# EAGLE board ExpositionTest (EAGLE 6.1)
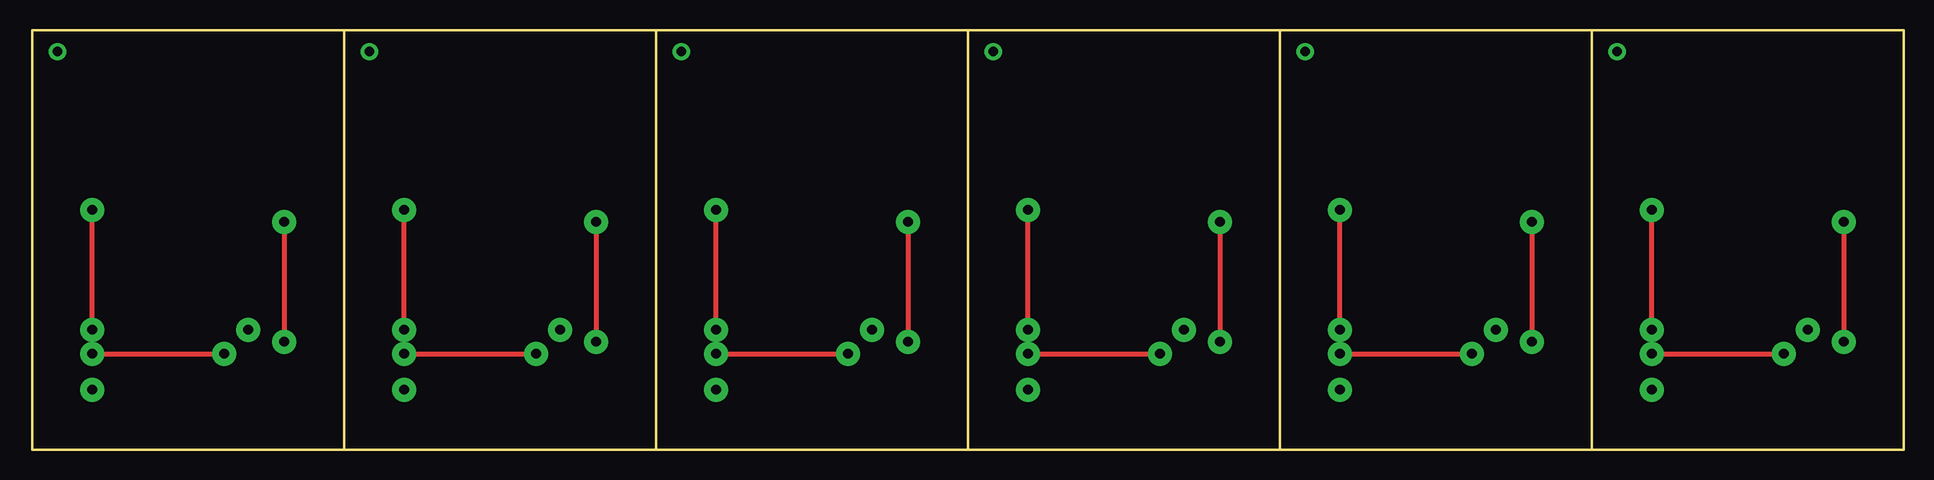
[diagram p0: board, top side]
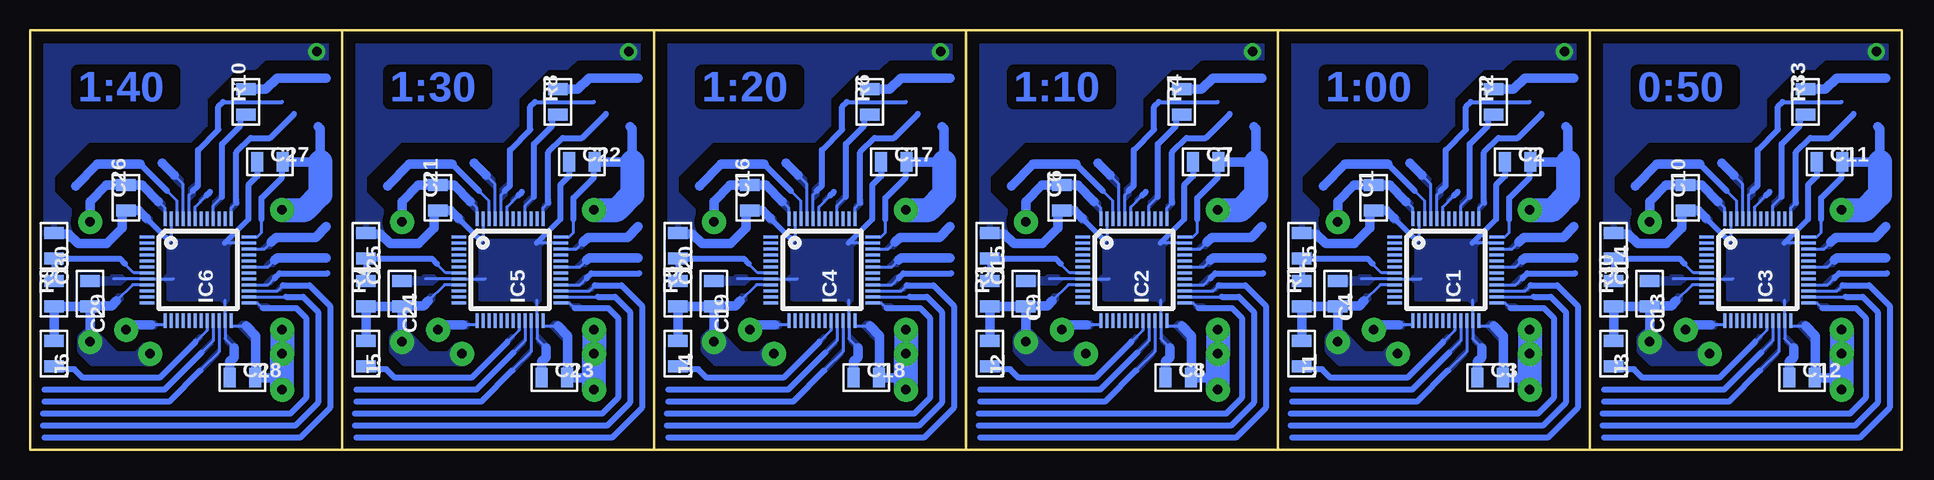
[diagram p1: board, bottom side, seen from below]

Size 156 x 35 mm. Coordinates in mm from the lower left corner, seen from the top.
Outline: 26,0 0,0 0,35 26,35
Outline: 26,0 26,35
Outline: 26,0 52,0
Outline: 52,0 52,35
Outline: 52,35 26,35
Outline: 26,35 26,0
Outline: 52,0 78,0
Outline: 78,0 78,35
Outline: 78,35 52,35
Outline: 52,35 52,0
Outline: 78,0 104,0
Outline: 104,0 104,35
Outline: 104,35 78,35
Outline: 78,35 78,0
Outline: 104,0 130,0
Outline: 130,0 130,35
Outline: 130,35 104,35
Outline: 104,35 104,0
Outline: 130,0 156,0 156,35 130,35
Outline: 130,35 130,0
Copper layers (1*16): Top 0.035mm / dielectric 1.5mm / Bottom 0.035mm
Design rules: minimum track width 0.25mm, minimum drill 0.6mm, track to track 0.25mm, track to pad 0.25mm, pad to pad 0.25mm, via to via 0.25mm, smd to smd 0mil, copper to edge 1mm, drill to drill 0.5mm, minimum pad ring 10mil, minimum via ring 8mil, stop-mask expansion 4mil, vias tented up to drill 0mil, thermal gap 10mil

## Footprints (pad centres in the part's own frame; a part is rotated, then mirrored left to right if it is on the bottom)
RSMD_0805 = smd 1 x 1.6: PAD_0 -1.05,0; PAD_1 1.05,0
LQFP48 = smd 0.25 x 1.2: 1 -2.75,-4.25; 2 -2.25,-4.25; 3 -1.75,-4.25; 4 -1.25,-4.25; 5 -0.75,-4.25; 6 -0.25,-4.25; 7 0.25,-4.25; 8 0.75,-4.25; 9 1.25,-4.25; 10 1.75,-4.25; 11 2.25,-4.25; 12 2.75,-4.25; 25 2.75,4.25; 26 2.25,4.25; 27 1.75,4.25; 28 1.25,4.25; 29 0.75,4.25; 30 0.25,4.25; 31 -0.25,4.25; 32 -0.75,4.25; 33 -1.25,4.25; 34 -1.75,4.25; 35 -2.25,4.25; 36 -2.75,4.25 | smd 1.2 x 0.25: 13 4.25,-2.75; 14 4.25,-2.25; 15 4.25,-1.75; 16 4.25,-1.25; 17 4.25,-0.75; 18 4.25,-0.25; 19 4.25,0.25; 20 4.25,0.75; 21 4.25,1.25; 22 4.25,1.75; 23 4.25,2.25; 24 4.25,2.75; 37 -4.25,2.75; 38 -4.25,2.25; 39 -4.25,1.75; 40 -4.25,1.25; 41 -4.25,0.75; 42 -4.25,0.25; 43 -4.25,-0.25; 44 -4.25,-0.75; 45 -4.25,-1.25; 46 -4.25,-1.75; 47 -4.25,-2.25; 48 -4.25,-2.75

## Placement (x,y rotation side)
C1  0.1uF  [RSMD_0805]  44,21 90 bottom
C2  0.1uF  [RSMD_0805]  32,24 0 bottom
C3  0.1uF  [RSMD_0805]  34.3,6 0 bottom
C4  0.1uF  [RSMD_0805]  47,13 270 bottom
C5  0.1uF  [RSMD_0805]  50,17 270 bottom
C6  0.1uF  [RSMD_0805]  70,21 90 bottom
C7  0.1uF  [RSMD_0805]  58,24 0 bottom
C8  0.1uF  [RSMD_0805]  60.3,6 0 bottom
C9  0.1uF  [RSMD_0805]  73,13 270 bottom
C10  0.1uF  [RSMD_0805]  18,21 90 bottom
C11  0.1uF  [RSMD_0805]  6,24 0 bottom
C12  0.1uF  [RSMD_0805]  8.3,6 0 bottom
C13  0.1uF  [RSMD_0805]  21,13 270 bottom
C14  0.1uF  [RSMD_0805]  24,17 270 bottom
C15  0.1uF  [RSMD_0805]  76,17 270 bottom
C16  0.1uF  [RSMD_0805]  96,21 90 bottom
C17  0.1uF  [RSMD_0805]  84,24 0 bottom
C18  0.1uF  [RSMD_0805]  86.3,6 0 bottom
C19  0.1uF  [RSMD_0805]  99,13 270 bottom
C20  0.1uF  [RSMD_0805]  102,17 270 bottom
C21  0.1uF  [RSMD_0805]  122,21 90 bottom
C22  0.1uF  [RSMD_0805]  110,24 0 bottom
C23  0.1uF  [RSMD_0805]  112.3,6 0 bottom
C24  0.1uF  [RSMD_0805]  125,13 270 bottom
C25  0.1uF  [RSMD_0805]  128,17 270 bottom
C26  0.1uF  [RSMD_0805]  148,21 90 bottom
C27  0.1uF  [RSMD_0805]  136,24 0 bottom
C28  0.1uF  [RSMD_0805]  138.3,6 0 bottom
C29  0.1uF  [RSMD_0805]  151,13 270 bottom
C30  0.1uF  [RSMD_0805]  154,17 270 bottom
IC1  STM32F103C8T6  [LQFP48]  38,15 270 bottom
IC2  STM32F103C8T6  [LQFP48]  64,15 270 bottom
IC3  STM32F103C8T6  [LQFP48]  12,15 270 bottom
IC4  STM32F103C8T6  [LQFP48]  90,15 270 bottom
IC5  STM32F103C8T6  [LQFP48]  116,15 270 bottom
IC6  STM32F103C8T6  [LQFP48]  142,15 270 bottom
J1  0  [RSMD_0805]  50,8 270 bottom
J2  0  [RSMD_0805]  76,8 270 bottom
J3  0  [RSMD_0805]  24,8 270 bottom
J4  0  [RSMD_0805]  102,8 270 bottom
J5  0  [RSMD_0805]  128,8 270 bottom
J6  0  [RSMD_0805]  154,8 270 bottom
R1  10K  [RSMD_0805]  50,13 90 bottom
R2  1K0  [RSMD_0805]  34,29 90 bottom
R3  10K  [RSMD_0805]  76,13 90 bottom
R4  1K0  [RSMD_0805]  60,29 90 bottom
R5  10K  [RSMD_0805]  102,13 90 bottom
R6  1K0  [RSMD_0805]  86,29 90 bottom
R7  10K  [RSMD_0805]  128,13 90 bottom
R8  1K0  [RSMD_0805]  112,29 90 bottom
R9  10K  [RSMD_0805]  154,13 90 bottom
R10  1K0  [RSMD_0805]  138,29 90 bottom
R30  10K  [RSMD_0805]  24,13 90 bottom
R33  1K0  [RSMD_0805]  8,29 90 bottom

## Library data of the parts
C1-C30 IC1-IC6 J1-J6 R1-R10 R30 R33 = __MyCommonLib1

## Nets
+3.3V: C10.PAD_1 C11.PAD_1 C12.PAD_1 C13.PAD_1 IC3.9 IC3.24 IC3.36 IC3.48 J3.PAD_0 R30.PAD_0
+3.3V1: C1.PAD_1 C2.PAD_1 C3.PAD_1 C4.PAD_1 IC1.9 IC1.24 IC1.36 IC1.48 J1.PAD_0 R1.PAD_0
+3.3V2: C6.PAD_1 C7.PAD_1 C8.PAD_1 C9.PAD_1 IC2.9 IC2.24 IC2.36 IC2.48 J2.PAD_0 R3.PAD_0
+3.3V3: C16.PAD_1 C17.PAD_1 C18.PAD_1 C19.PAD_1 IC4.9 IC4.24 IC4.36 IC4.48 J4.PAD_0 R5.PAD_0
+3.3V4: C21.PAD_1 C22.PAD_1 C23.PAD_1 C24.PAD_1 IC5.9 IC5.24 IC5.36 IC5.48 J5.PAD_0 R7.PAD_0
+3.3V5: C26.PAD_1 C27.PAD_1 C28.PAD_1 C29.PAD_1 IC6.9 IC6.24 IC6.36 IC6.48 J6.PAD_0 R9.PAD_0
ADC_9V: IC3.13
ADC_9V1: IC1.13
ADC_9V2: IC2.13
ADC_9V3: IC4.13
ADC_9V4: IC5.13
ADC_9V5: IC6.13
BOOT0: IC3.44
BOOT1: IC3.20 J3.PAD_1
BOOT2: IC1.20 J1.PAD_1
BOOT3: IC1.44
BOOT4: IC2.20 J2.PAD_1
BOOT5: IC2.44
BOOT6: IC4.20 J4.PAD_1
BOOT7: IC4.44
BOOT8: IC5.20 J5.PAD_1
BOOT9: IC5.44
BOOT10: IC6.20 J6.PAD_1
BOOT11: IC6.44
ERROR_LED: IC3.40 R33.PAD_0
ERROR_LED1: IC1.40 R2.PAD_0
ERROR_LED2: IC2.40 R4.PAD_0
ERROR_LED3: IC4.40 R6.PAD_0
ERROR_LED4: IC5.40 R8.PAD_0
ERROR_LED5: IC6.40 R10.PAD_0
GND: C10.PAD_0 C11.PAD_0 C12.PAD_0 C13.PAD_0 C14.PAD_0 IC3.8 IC3.23 IC3.35 IC3.47
GND1: C1.PAD_0 C2.PAD_0 C3.PAD_0 C4.PAD_0 C5.PAD_0 IC1.8 IC1.23 IC1.35 IC1.47
GND7: C6.PAD_0 C7.PAD_0 C8.PAD_0 C9.PAD_0 C15.PAD_0 IC2.8 IC2.23 IC2.35 IC2.47
GND8: C16.PAD_0 C17.PAD_0 C18.PAD_0 C19.PAD_0 C20.PAD_0 IC4.8 IC4.23 IC4.35 IC4.47
GND9: C21.PAD_0 C22.PAD_0 C23.PAD_0 C24.PAD_0 C25.PAD_0 IC5.8 IC5.23 IC5.35 IC5.47
GND10: C26.PAD_0 C27.PAD_0 C28.PAD_0 C29.PAD_0 C30.PAD_0 IC6.8 IC6.23 IC6.35 IC6.47
I2C_SCL: IC3.21
I2C_SCL1: IC1.21
I2C_SCL2: IC2.21
I2C_SCL3: IC4.21
I2C_SCL4: IC5.21
I2C_SCL5: IC6.21
I2C_SDA: IC3.22
I2C_SDA1: IC1.22
I2C_SDA2: IC2.22
I2C_SDA3: IC4.22
I2C_SDA4: IC5.22
I2C_SDA5: IC6.22
LCD_D1: IC1.27
LCD_D2: IC1.26
LCD_D3: IC1.28
LCD_D4: IC3.25
LCD_D5: IC3.28
LCD_D6: IC3.26
LCD_D7: IC3.27
LCD_D8: IC1.25
LCD_D9: IC2.27
LCD_D10: IC2.26
LCD_D11: IC2.28
LCD_D12: IC2.25
LCD_D13: IC4.27
LCD_D14: IC4.26
LCD_D15: IC4.28
LCD_D16: IC4.25
LCD_D17: IC5.27
LCD_D18: IC5.26
LCD_D19: IC5.28
LCD_D20: IC5.25
LCD_D21: IC6.27
LCD_D22: IC6.26
LCD_D23: IC6.28
LCD_D24: IC6.25
LCD_E: IC3.43
LCD_E1: IC1.43
LCD_E2: IC2.43
LCD_E3: IC4.43
LCD_E4: IC5.43
LCD_E5: IC6.43
LCD_R/~W: IC3.46
LCD_R/~W1: IC1.46
LCD_R/~W2: IC2.46
LCD_R/~W3: IC4.46
LCD_R/~W4: IC5.46
LCD_R/~W5: IC6.46
LCD_RS: IC3.45
LCD_RS1: IC1.45
LCD_RS2: IC2.45
LCD_RS3: IC4.45
LCD_RS4: IC5.45
LCD_RS5: IC6.45
N$1: R2.PAD_1
N$2: R4.PAD_1
N$3: R6.PAD_1
N$4: R8.PAD_1
N$5: R10.PAD_1
N$19: R33.PAD_1
NRST: C14.PAD_1 IC3.7 R30.PAD_1
NRST1: C5.PAD_1 IC1.7 R1.PAD_1
NRST2: C15.PAD_1 IC2.7 R3.PAD_1
NRST3: C20.PAD_1 IC4.7 R5.PAD_1
NRST4: C25.PAD_1 IC5.7 R7.PAD_1
NRST5: C30.PAD_1 IC6.7 R9.PAD_1
PWR_HOLD: IC3.31
PWR_HOLD1: IC1.31
PWR_HOLD2: IC2.31
PWR_HOLD3: IC4.31
PWR_HOLD4: IC5.31
PWR_HOLD5: IC6.31
SWDCLK: IC3.37
SWDCLK1: IC1.37
SWDCLK2: IC2.37
SWDCLK3: IC4.37
SWDCLK4: IC5.37
SWDCLK5: IC6.37
SWDIO: IC3.34
SWDIO1: IC1.34
SWDIO2: IC2.34
SWDIO3: IC4.34
SWDIO4: IC5.34
SWDIO5: IC6.34

## Tracks (layer width: path | path; a pad name or v marks a point on that pad's centre or on a via)
+3.3V  (via drill 0.8 pad 2)
  Top 0.4: v5,8 v16,8 | v5,10 v5,20
  Top 0.406: v21,19 v21,9
  Bottom 0.25: IC3.24 9.25,10.3 8,10.3 | IC3.9 17.45,13.75 18.8,12.4 | IC3.48 14.75,20.15 15.3,20.7 | IC3.36 7.05,17.75 6.7,18.1 6.7,19.2
  Bottom 0.406: 20.95,12 C13.PAD_1
  Bottom 0.5: 6.7,19.2 6.7,21 5,22.7 5,23.95 C11.PAD_1
  Bottom 0.8: 8,10.3 7.2,9.5 7.2,6.05 C12.PAD_1 5.5,6 5,5.5 | 18.8,12.4 19.2,12 20.95,12 | v21,9 C13.PAD_1 R30.PAD_0 J3.PAD_0 | v21,19 21,20.7 19.65,22.05 C10.PAD_1 16.65,22.05 15.3,20.7 | C11.PAD_1 4.85,24.1 4.75,24 1.81,24 1.81,26.76 2,26.95
  Bottom 2: v5,10 v5,8 5,5.5 v5,5 | 1.81,24 1.81,21.27 3.08,20 v5,20
  pour Bottom: 15.3,8.2 15.3,7.7 15.8,7.2 20.8,7.2 21.8,8.2 21.8,9.4 21.4,9.8 20.6,9.8 18.8,8 17.1,8 16.4,8.7 15.8,8.7
  pour Bottom (no thermals): 14.8,19.8 14.8,20.6 15.2,21 15.6,20.6
  pour Bottom: 7.4,10.1 7.9,10.6 8.4,10.6 8.7,10.3 7.4,9
  pour Bottom: 18.7,12.1 18.3,12.5 18.3,12.9 18.7,12.9 19.1,12.5
+3.3V1  (via drill 0.8 pad 2)
  Top 0.4: v31,8 v42,8 | v31,10 v31,20
  Top 0.406: v47,19 v47,9
  Bottom 0.25: IC1.24 35.25,10.3 34,10.3 | IC1.9 43.45,13.75 44.8,12.4 | IC1.48 40.75,20.15 41.3,20.7 | IC1.36 33.05,17.75 32.7,18.1 32.7,19.2
  Bottom 0.406: 46.95,12 C4.PAD_1
  Bottom 0.5: 32.7,19.2 32.7,21 31,22.7 31,23.95 C2.PAD_1
  Bottom 0.8: 34,10.3 33.2,9.5 33.2,6.05 C3.PAD_1 31.5,6 31,5.5 | 44.8,12.4 45.2,12 46.95,12 | v47,9 C4.PAD_1 R1.PAD_0 J1.PAD_0 | v47,19 47,20.7 45.65,22.05 C1.PAD_1 42.65,22.05 41.3,20.7 | C2.PAD_1 30.85,24.1 30.75,24 27.81,24 27.81,26.76 28,26.95
  Bottom 2: v31,10 v31,8 31,5.5 v31,5 | 27.81,24 27.81,21.27 29.08,20 v31,20
  pour Bottom: 41.3,8.2 41.3,7.7 41.8,7.2 46.8,7.2 47.8,8.2 47.8,9.4 47.4,9.8 46.6,9.8 44.8,8 43.1,8 42.4,8.7 41.8,8.7
  pour Bottom (no thermals): 40.8,19.8 40.8,20.6 41.2,21 41.6,20.6
  pour Bottom: 33.4,10.1 33.9,10.6 34.4,10.6 34.7,10.3 33.4,9
  pour Bottom: 44.7,12.1 44.3,12.5 44.3,12.9 44.7,12.9 45.1,12.5
+3.3V2  (via drill 0.8 pad 2)
  Top 0.4: v57,8 v68,8 | v57,10 v57,20
  Top 0.406: v73,19 v73,9
  Bottom 0.25: IC2.24 61.25,10.3 60,10.3 | IC2.9 69.45,13.75 70.8,12.4 | IC2.48 66.75,20.15 67.3,20.7 | IC2.36 59.05,17.75 58.7,18.1 58.7,19.2
  Bottom 0.406: 72.95,12 C9.PAD_1
  Bottom 0.5: 58.7,19.2 58.7,21 57,22.7 57,23.95 C7.PAD_1
  Bottom 0.8: 60,10.3 59.2,9.5 59.2,6.05 C8.PAD_1 57.5,6 57,5.5 | 70.8,12.4 71.2,12 72.95,12 | v73,9 C9.PAD_1 R3.PAD_0 J2.PAD_0 | v73,19 73,20.7 71.65,22.05 C6.PAD_1 68.65,22.05 67.3,20.7 | C7.PAD_1 56.85,24.1 56.75,24 53.81,24 53.81,26.76 54,26.95
  Bottom 2: v57,10 v57,8 57,5.5 v57,5 | 53.81,24 53.81,21.27 55.08,20 v57,20
  pour Bottom: 67.3,8.2 67.3,7.7 67.8,7.2 72.8,7.2 73.8,8.2 73.8,9.4 73.4,9.8 72.6,9.8 70.8,8 69.1,8 68.4,8.7 67.8,8.7
  pour Bottom (no thermals): 66.8,19.8 66.8,20.6 67.2,21 67.6,20.6
  pour Bottom: 59.4,10.1 59.9,10.6 60.4,10.6 60.7,10.3 59.4,9
  pour Bottom: 70.7,12.1 70.3,12.5 70.3,12.9 70.7,12.9 71.1,12.5
+3.3V3  (via drill 0.8 pad 2)
  Top 0.4: v83,8 v94,8 | v83,10 v83,20
  Top 0.406: v99,19 v99,9
  Bottom 0.25: IC4.24 87.25,10.3 86,10.3 | IC4.9 95.45,13.75 96.8,12.4 | IC4.48 92.75,20.15 93.3,20.7 | IC4.36 85.05,17.75 84.7,18.1 84.7,19.2
  Bottom 0.406: 98.95,12 C19.PAD_1
  Bottom 0.5: 84.7,19.2 84.7,21 83,22.7 83,23.95 C17.PAD_1
  Bottom 0.8: 86,10.3 85.2,9.5 85.2,6.05 C18.PAD_1 83.5,6 83,5.5 | 96.8,12.4 97.2,12 98.95,12 | v99,9 C19.PAD_1 R5.PAD_0 J4.PAD_0 | v99,19 99,20.7 97.65,22.05 C16.PAD_1 94.65,22.05 93.3,20.7 | C17.PAD_1 82.85,24.1 82.75,24 79.81,24 79.81,26.76 80,26.95
  Bottom 2: v83,10 v83,8 83,5.5 v83,5 | 79.81,24 79.81,21.27 81.08,20 v83,20
  pour Bottom: 93.3,8.2 93.3,7.7 93.8,7.2 98.8,7.2 99.8,8.2 99.8,9.4 99.4,9.8 98.6,9.8 96.8,8 95.1,8 94.4,8.7 93.8,8.7
  pour Bottom (no thermals): 92.8,19.8 92.8,20.6 93.2,21 93.6,20.6
  pour Bottom: 85.4,10.1 85.9,10.6 86.4,10.6 86.7,10.3 85.4,9
  pour Bottom: 96.7,12.1 96.3,12.5 96.3,12.9 96.7,12.9 97.1,12.5
+3.3V4  (via drill 0.8 pad 2)
  Top 0.4: v109,8 v120,8 | v109,10 v109,20
  Top 0.406: v125,19 v125,9
  Bottom 0.25: IC5.24 113.25,10.3 112,10.3 | IC5.9 121.45,13.75 122.8,12.4 | IC5.48 118.75,20.15 119.3,20.7 | IC5.36 111.05,17.75 110.7,18.1 110.7,19.2
  Bottom 0.406: 124.95,12 C24.PAD_1
  Bottom 0.5: 110.7,19.2 110.7,21 109,22.7 109,23.95 C22.PAD_1
  Bottom 0.8: 112,10.3 111.2,9.5 111.2,6.05 C23.PAD_1 109.5,6 109,5.5 | 122.8,12.4 123.2,12 124.95,12 | v125,9 C24.PAD_1 R7.PAD_0 J5.PAD_0 | v125,19 125,20.7 123.65,22.05 C21.PAD_1 120.65,22.05 119.3,20.7 | C22.PAD_1 108.85,24.1 108.75,24 105.81,24 105.81,26.76 106,26.95
  Bottom 2: v109,10 v109,8 109,5.5 v109,5 | 105.81,24 105.81,21.27 107.08,20 v109,20
  pour Bottom: 119.3,8.2 119.3,7.7 119.8,7.2 124.8,7.2 125.8,8.2 125.8,9.4 125.4,9.8 124.6,9.8 122.8,8 121.1,8 120.4,8.7 119.8,8.7
  pour Bottom (no thermals): 118.8,19.8 118.8,20.6 119.2,21 119.6,20.6
  pour Bottom: 111.4,10.1 111.9,10.6 112.4,10.6 112.7,10.3 111.4,9
  pour Bottom: 122.7,12.1 122.3,12.5 122.3,12.9 122.7,12.9 123.1,12.5
+3.3V5  (via drill 0.8 pad 2)
  Top 0.4: v135,8 v146,8 | v135,10 v135,20
  Top 0.406: v151,19 v151,9
  Bottom 0.25: IC6.24 139.25,10.3 138,10.3 | IC6.9 147.45,13.75 148.8,12.4 | IC6.48 144.75,20.15 145.3,20.7 | IC6.36 137.05,17.75 136.7,18.1 136.7,19.2
  Bottom 0.406: 150.95,12 C29.PAD_1
  Bottom 0.5: 136.7,19.2 136.7,21 135,22.7 135,23.95 C27.PAD_1
  Bottom 0.8: 138,10.3 137.2,9.5 137.2,6.05 C28.PAD_1 135.5,6 135,5.5 | 148.8,12.4 149.2,12 150.95,12 | v151,9 C29.PAD_1 R9.PAD_0 J6.PAD_0 | v151,19 151,20.7 149.65,22.05 C26.PAD_1 146.65,22.05 145.3,20.7 | C27.PAD_1 134.85,24.1 134.75,24 131.81,24 131.81,26.76 132,26.95
  Bottom 2: v135,10 v135,8 135,5.5 v135,5 | 131.81,24 131.81,21.27 133.08,20 v135,20
  pour Bottom: 145.3,8.2 145.3,7.7 145.8,7.2 150.8,7.2 151.8,8.2 151.8,9.4 151.4,9.8 150.6,9.8 148.8,8 147.1,8 146.4,8.7 145.8,8.7
  pour Bottom (no thermals): 144.8,19.8 144.8,20.6 145.2,21 145.6,20.6
  pour Bottom: 137.4,10.1 137.9,10.6 138.4,10.6 138.7,10.3 137.4,9
  pour Bottom: 148.7,12.1 148.3,12.5 148.3,12.9 148.7,12.9 149.1,12.5
ADC_9V  (via drill 0.8 pad 2)
  Bottom 0.25: IC3.13 14.75,10.4 15.9,10.4
  Bottom 0.8: 15.9,10.4 17.6,10.4 v18,10
  pour Bottom: 15.3,10.4 15.6,10.1 16,10.1 16,10.7 15.6,10.7
ADC_9V1  (via drill 0.8 pad 2)
  Bottom 0.25: IC1.13 40.75,10.4 41.9,10.4
  Bottom 0.8: 41.9,10.4 43.6,10.4 v44,10
  pour Bottom: 41.3,10.4 41.6,10.1 42,10.1 42,10.7 41.6,10.7
ADC_9V2  (via drill 0.8 pad 2)
  Bottom 0.25: IC2.13 66.75,10.4 67.9,10.4
  Bottom 0.8: 67.9,10.4 69.6,10.4 v70,10
  pour Bottom: 67.3,10.4 67.6,10.1 68,10.1 68,10.7 67.6,10.7
ADC_9V3  (via drill 0.8 pad 2)
  Bottom 0.25: IC4.13 92.75,10.4 93.9,10.4
  Bottom 0.8: 93.9,10.4 95.6,10.4 v96,10
  pour Bottom: 93.3,10.4 93.6,10.1 94,10.1 94,10.7 93.6,10.7
ADC_9V4  (via drill 0.8 pad 2)
  Bottom 0.25: IC5.13 118.75,10.4 119.9,10.4
  Bottom 0.8: 119.9,10.4 121.6,10.4 v122,10
  pour Bottom: 119.3,10.4 119.6,10.1 120,10.1 120,10.7 119.6,10.7
ADC_9V5  (via drill 0.8 pad 2)
  Bottom 0.25: IC6.13 144.75,10.4 145.9,10.4
  Bottom 0.8: 145.9,10.4 147.6,10.4 v148,10
  pour Bottom: 145.3,10.4 145.6,10.1 146,10.1 146,10.7 145.6,10.7
BOOT0
  Bottom 0.25: IC3.44 12.75,21.25 12.4,21.6
  Bottom 0.35: 9.9,29 5,29
  Bottom 0.5: 9.9,29 10.3,28.6 10.3,26.7 12,25 12,22 12.4,21.6
  pour Bottom: 12,22.5 12,21.8 12.3,21.5 12.3,21.2 12.7,20.8 12.7,21.8
BOOT1
  Bottom 0.25: IC3.20 11.25,9.95 12.2,9
  Bottom 0.4: 23.95,7 J3.PAD_1
  Bottom 0.5: 12.2,9 15.2,6 21.6,6 22.3,6.7 23.75,6.7 J3.PAD_1
  pour Bottom: 12.1,8.9 11.7,9.3 11.7,9.5 11.9,9.5 12.3,9.1
BOOT2
  Bottom 0.25: IC1.20 37.25,9.95 38.2,9
  Bottom 0.4: 49.95,7 J1.PAD_1
  Bottom 0.5: 38.2,9 41.2,6 47.6,6 48.3,6.7 49.75,6.7 J1.PAD_1
  pour Bottom: 38.1,8.9 37.7,9.3 37.7,9.5 37.9,9.5 38.3,9.1
BOOT3
  Bottom 0.25: IC1.44 38.75,21.25 38.4,21.6
  Bottom 0.35: 35.9,29 31,29
  Bottom 0.5: 35.9,29 36.3,28.6 36.3,26.7 38,25 38,22 38.4,21.6
  pour Bottom: 38,22.5 38,21.8 38.3,21.5 38.3,21.2 38.7,20.8 38.7,21.8
BOOT4
  Bottom 0.25: IC2.20 63.25,9.95 64.2,9
  Bottom 0.4: 75.95,7 J2.PAD_1
  Bottom 0.5: 64.2,9 67.2,6 73.6,6 74.3,6.7 75.75,6.7 J2.PAD_1
  pour Bottom: 64.1,8.9 63.7,9.3 63.7,9.5 63.9,9.5 64.3,9.1
BOOT5
  Bottom 0.25: IC2.44 64.75,21.25 64.4,21.6
  Bottom 0.35: 61.9,29 57,29
  Bottom 0.5: 61.9,29 62.3,28.6 62.3,26.7 64,25 64,22 64.4,21.6
  pour Bottom: 64,22.5 64,21.8 64.3,21.5 64.3,21.2 64.7,20.8 64.7,21.8
BOOT6
  Bottom 0.25: IC4.20 89.25,9.95 90.2,9
  Bottom 0.4: 101.95,7 J4.PAD_1
  Bottom 0.5: 90.2,9 93.2,6 99.6,6 100.3,6.7 101.75,6.7 J4.PAD_1
  pour Bottom: 90.1,8.9 89.7,9.3 89.7,9.5 89.9,9.5 90.3,9.1
BOOT7
  Bottom 0.25: IC4.44 90.75,21.25 90.4,21.6
  Bottom 0.35: 87.9,29 83,29
  Bottom 0.5: 87.9,29 88.3,28.6 88.3,26.7 90,25 90,22 90.4,21.6
  pour Bottom: 90,22.5 90,21.8 90.3,21.5 90.3,21.2 90.7,20.8 90.7,21.8
BOOT8
  Bottom 0.25: IC5.20 115.25,9.95 116.2,9
  Bottom 0.4: 127.95,7 J5.PAD_1
  Bottom 0.5: 116.2,9 119.2,6 125.6,6 126.3,6.7 127.75,6.7 J5.PAD_1
  pour Bottom: 116.1,8.9 115.7,9.3 115.7,9.5 115.9,9.5 116.3,9.1
BOOT9
  Bottom 0.25: IC5.44 116.75,21.25 116.4,21.6
  Bottom 0.35: 113.9,29 109,29
  Bottom 0.5: 113.9,29 114.3,28.6 114.3,26.7 116,25 116,22 116.4,21.6
  pour Bottom: 116,22.5 116,21.8 116.3,21.5 116.3,21.2 116.7,20.8 116.7,21.8
BOOT10
  Bottom 0.25: IC6.20 141.25,9.95 142.2,9
  Bottom 0.4: 153.95,7 J6.PAD_1
  Bottom 0.5: 142.2,9 145.2,6 151.6,6 152.3,6.7 153.75,6.7 J6.PAD_1
  pour Bottom: 142.1,8.9 141.7,9.3 141.7,9.5 141.9,9.5 142.3,9.1
BOOT11
  Bottom 0.25: IC6.44 142.75,21.25 142.4,21.6
  Bottom 0.35: 139.9,29 135,29
  Bottom 0.5: 139.9,29 140.3,28.6 140.3,26.7 142,25 142,22 142.4,21.6
  pour Bottom: 142,22.5 142,21.8 142.3,21.5 142.3,21.2 142.7,20.8 142.7,21.8
ERROR_LED
  Bottom 0.25: IC3.40 10.75,20.35 10,21.1
  Bottom 0.5: 10,21.1 10,25.5 8.5,27 8.5,27.45 arc90 R33.PAD_0
  pour Bottom: 9.9,21.5 9.9,21 10.7,20.2 10.7,20.7
ERROR_LED1
  Bottom 0.25: IC1.40 36.75,20.35 36,21.1
  Bottom 0.5: 36,21.1 36,25.5 34.5,27 34.5,27.45 arc90 R2.PAD_0
  pour Bottom: 35.9,21.5 35.9,21 36.7,20.2 36.7,20.7
ERROR_LED2
  Bottom 0.25: IC2.40 62.75,20.35 62,21.1
  Bottom 0.5: 62,21.1 62,25.5 60.5,27 60.5,27.45 arc90 R4.PAD_0
  pour Bottom: 61.9,21.5 61.9,21 62.7,20.2 62.7,20.7
ERROR_LED3
  Bottom 0.25: IC4.40 88.75,20.35 88,21.1
  Bottom 0.5: 88,21.1 88,25.5 86.5,27 86.5,27.45 arc90 R6.PAD_0
  pour Bottom: 87.9,21.5 87.9,21 88.7,20.2 88.7,20.7
ERROR_LED4
  Bottom 0.25: IC5.40 114.75,20.35 114,21.1
  Bottom 0.5: 114,21.1 114,25.5 112.5,27 112.5,27.45 arc90 R8.PAD_0
  pour Bottom: 113.9,21.5 113.9,21 114.7,20.2 114.7,20.7
ERROR_LED5
  Bottom 0.25: IC6.40 140.75,20.35 140,21.1
  Bottom 0.5: 140,21.1 140,25.5 138.5,27 138.5,27.45 arc90 R10.PAD_0
  pour Bottom: 139.9,21.5 139.9,21 140.7,20.2 140.7,20.7
GND  (via drill 0.8 pad 1.42)
  Bottom 0.25: IC3.35 9.65,17.25 | 9.75,12.45 IC3.23 9.75,9.25 9,8.5 | IC3.47 14.25,17.55 | 14.05,14.25 IC3.8 19.05,14.25
  Bottom 0.4: 16.3,19.3 14.4,17.4 | 7.8,19.2 9.8,17.2
  Bottom 0.5: 7.8,19.2 7.8,22.05 7.05,22.8 C11.PAD_0
  Bottom 0.8: C12.PAD_0 9.35,7.35 9,7.7 9,8.5 | C14.PAD_0 23.95,18 22.8,18 22,17.2 19.6,17.2 18.3,18.5 18.3,19.65 C10.PAD_0 16.95,19.95 16.3,19.3
  other vias: 2.1,33.2
  pour Bottom: 9.5,17.5 9.2,17.8 9.2,17.2 9.5,16.9 9.5,12.4 9.7,12.2 9.8,12.2 10.1,12.5 14.5,12.5 14.5,13.9 14.8,14.2 14.8,14.3 14.5,14.6 14.5,17.4 14.7,17.6 14.7,17.8 14.2,17.8 13.9,17.5
  pour Bottom (isolate 0.6): 1.2,32.7 6.5,32.7 7.3,31.9 8.9,31.9 11.5,29.3 11.5,26.9 12.6,25.8 21.2,25.8 24.2,22.8 24.2,21.4 22.7,19.9 22.7,18 22.8,17.9 24.7,17.9 24.8,33.8 1.2,33.8
  pour Bottom: 8.7,8.5 8.7,8.6 9.7,9.6 9.7,9 9.2,8.5
  pour Bottom (no thermals): 21.1,13.8 18.4,13.8 18,14.2 18.3,14.5 19.2,14.5 19.4,14.3 21.1,14.3
  pour Bottom: 15.9,18.9 16.3,18.9 16.6,19.2 16.2,19.6 15.9,19.3
GND1  (via drill 0.8 pad 1.42)
  Bottom 0.25: IC1.35 35.65,17.25 | 35.75,12.45 IC1.23 35.75,9.25 35,8.5 | IC1.47 40.25,17.55 | 40.05,14.25 IC1.8 45.05,14.25
  Bottom 0.4: 42.3,19.3 40.4,17.4 | 33.8,19.2 35.8,17.2
  Bottom 0.5: 33.8,19.2 33.8,22.05 33.05,22.8 C2.PAD_0
  Bottom 0.8: C3.PAD_0 35.35,7.35 35,7.7 35,8.5 | C5.PAD_0 49.95,18 48.8,18 48,17.2 45.6,17.2 44.3,18.5 44.3,19.65 C1.PAD_0 42.95,19.95 42.3,19.3
  other vias: 28.1,33.2
  pour Bottom: 35.5,17.5 35.2,17.8 35.2,17.2 35.5,16.9 35.5,12.4 35.7,12.2 35.8,12.2 36.1,12.5 40.5,12.5 40.5,13.9 40.8,14.2 40.8,14.3 40.5,14.6 40.5,17.4 40.7,17.6 40.7,17.8 40.2,17.8 39.9,17.5
  pour Bottom (isolate 0.6): 27.2,32.7 32.5,32.7 33.3,31.9 34.9,31.9 37.5,29.3 37.5,26.9 38.6,25.8 47.2,25.8 50.2,22.8 50.2,21.4 48.7,19.9 48.7,18 48.8,17.9 50.7,17.9 50.8,33.8 27.2,33.8
  pour Bottom: 34.7,8.5 34.7,8.6 35.7,9.6 35.7,9 35.2,8.5
  pour Bottom (no thermals): 47.1,13.8 44.4,13.8 44,14.2 44.3,14.5 45.2,14.5 45.4,14.3 47.1,14.3
  pour Bottom: 41.9,18.9 42.3,18.9 42.6,19.2 42.2,19.6 41.9,19.3
GND7  (via drill 0.8 pad 1.42)
  Bottom 0.25: IC2.35 61.65,17.25 | 61.75,12.45 IC2.23 61.75,9.25 61,8.5 | IC2.47 66.25,17.55 | 66.05,14.25 IC2.8 71.05,14.25
  Bottom 0.4: 68.3,19.3 66.4,17.4 | 59.8,19.2 61.8,17.2
  Bottom 0.5: 59.8,19.2 59.8,22.05 59.05,22.8 C7.PAD_0
  Bottom 0.8: C8.PAD_0 61.35,7.35 61,7.7 61,8.5 | C15.PAD_0 75.95,18 74.8,18 74,17.2 71.6,17.2 70.3,18.5 70.3,19.65 C6.PAD_0 68.95,19.95 68.3,19.3
  other vias: 54.1,33.2
  pour Bottom: 61.5,17.5 61.2,17.8 61.2,17.2 61.5,16.9 61.5,12.4 61.7,12.2 61.8,12.2 62.1,12.5 66.5,12.5 66.5,13.9 66.8,14.2 66.8,14.3 66.5,14.6 66.5,17.4 66.7,17.6 66.7,17.8 66.2,17.8 65.9,17.5
  pour Bottom (isolate 0.6): 53.2,32.7 58.5,32.7 59.3,31.9 60.9,31.9 63.5,29.3 63.5,26.9 64.6,25.8 73.2,25.8 76.2,22.8 76.2,21.4 74.7,19.9 74.7,18 74.8,17.9 76.7,17.9 76.8,33.8 53.2,33.8
  pour Bottom: 60.7,8.5 60.7,8.6 61.7,9.6 61.7,9 61.2,8.5
  pour Bottom (no thermals): 73.1,13.8 70.4,13.8 70,14.2 70.3,14.5 71.2,14.5 71.4,14.3 73.1,14.3
  pour Bottom: 67.9,18.9 68.3,18.9 68.6,19.2 68.2,19.6 67.9,19.3
GND8  (via drill 0.8 pad 1.42)
  Bottom 0.25: IC4.35 87.65,17.25 | 87.75,12.45 IC4.23 87.75,9.25 87,8.5 | IC4.47 92.25,17.55 | 92.05,14.25 IC4.8 97.05,14.25
  Bottom 0.4: 94.3,19.3 92.4,17.4 | 85.8,19.2 87.8,17.2
  Bottom 0.5: 85.8,19.2 85.8,22.05 85.05,22.8 C17.PAD_0
  Bottom 0.8: C18.PAD_0 87.35,7.35 87,7.7 87,8.5 | C20.PAD_0 101.95,18 100.8,18 100,17.2 97.6,17.2 96.3,18.5 96.3,19.65 C16.PAD_0 94.95,19.95 94.3,19.3
  other vias: 80.1,33.2
  pour Bottom: 87.5,17.5 87.2,17.8 87.2,17.2 87.5,16.9 87.5,12.4 87.7,12.2 87.8,12.2 88.1,12.5 92.5,12.5 92.5,13.9 92.8,14.2 92.8,14.3 92.5,14.6 92.5,17.4 92.7,17.6 92.7,17.8 92.2,17.8 91.9,17.5
  pour Bottom (isolate 0.6): 79.2,32.7 84.5,32.7 85.3,31.9 86.9,31.9 89.5,29.3 89.5,26.9 90.6,25.8 99.2,25.8 102.2,22.8 102.2,21.4 100.7,19.9 100.7,18 100.8,17.9 102.7,17.9 102.8,33.8 79.2,33.8
  pour Bottom: 86.7,8.5 86.7,8.6 87.7,9.6 87.7,9 87.2,8.5
  pour Bottom (no thermals): 99.1,13.8 96.4,13.8 96,14.2 96.3,14.5 97.2,14.5 97.4,14.3 99.1,14.3
  pour Bottom: 93.9,18.9 94.3,18.9 94.6,19.2 94.2,19.6 93.9,19.3
GND9  (via drill 0.8 pad 1.42)
  Bottom 0.25: IC5.35 113.65,17.25 | 113.75,12.45 IC5.23 113.75,9.25 113,8.5 | IC5.47 118.25,17.55 | 118.05,14.25 IC5.8 123.05,14.25
  Bottom 0.4: 120.3,19.3 118.4,17.4 | 111.8,19.2 113.8,17.2
  Bottom 0.5: 111.8,19.2 111.8,22.05 111.05,22.8 C22.PAD_0
  Bottom 0.8: C23.PAD_0 113.35,7.35 113,7.7 113,8.5 | C25.PAD_0 127.95,18 126.8,18 126,17.2 123.6,17.2 122.3,18.5 122.3,19.65 C21.PAD_0 120.95,19.95 120.3,19.3
  other vias: 106.1,33.2
  pour Bottom: 113.5,17.5 113.2,17.8 113.2,17.2 113.5,16.9 113.5,12.4 113.7,12.2 113.8,12.2 114.1,12.5 118.5,12.5 118.5,13.9 118.8,14.2 118.8,14.3 118.5,14.6 118.5,17.4 118.7,17.6 118.7,17.8 118.2,17.8 117.9,17.5
  pour Bottom (isolate 0.6): 105.2,32.7 110.5,32.7 111.3,31.9 112.9,31.9 115.5,29.3 115.5,26.9 116.6,25.8 125.2,25.8 128.2,22.8 128.2,21.4 126.7,19.9 126.7,18 126.8,17.9 128.7,17.9 128.8,33.8 105.2,33.8
  pour Bottom: 112.7,8.5 112.7,8.6 113.7,9.6 113.7,9 113.2,8.5
  pour Bottom (no thermals): 125.1,13.8 122.4,13.8 122,14.2 122.3,14.5 123.2,14.5 123.4,14.3 125.1,14.3
  pour Bottom: 119.9,18.9 120.3,18.9 120.6,19.2 120.2,19.6 119.9,19.3
GND10  (via drill 0.8 pad 1.42)
  Bottom 0.25: IC6.35 139.65,17.25 | 139.75,12.45 IC6.23 139.75,9.25 139,8.5 | IC6.47 144.25,17.55 | 144.05,14.25 IC6.8 149.05,14.25
  Bottom 0.4: 146.3,19.3 144.4,17.4 | 137.8,19.2 139.8,17.2
  Bottom 0.5: 137.8,19.2 137.8,22.05 137.05,22.8 C27.PAD_0
  Bottom 0.8: C28.PAD_0 139.35,7.35 139,7.7 139,8.5 | C30.PAD_0 153.95,18 152.8,18 152,17.2 149.6,17.2 148.3,18.5 148.3,19.65 C26.PAD_0 146.95,19.95 146.3,19.3
  other vias: 132.1,33.2
  pour Bottom: 139.5,17.5 139.2,17.8 139.2,17.2 139.5,16.9 139.5,12.4 139.7,12.2 139.8,12.2 140.1,12.5 144.5,12.5 144.5,13.9 144.8,14.2 144.8,14.3 144.5,14.6 144.5,17.4 144.7,17.6 144.7,17.8 144.2,17.8 143.9,17.5
  pour Bottom (isolate 0.6): 131.2,32.7 136.5,32.7 137.3,31.9 138.9,31.9 141.5,29.3 141.5,26.9 142.6,25.8 151.2,25.8 154.2,22.8 154.2,21.4 152.7,19.9 152.7,18 152.8,17.9 154.7,17.9 154.8,33.8 131.2,33.8
  pour Bottom: 138.7,8.5 138.7,8.6 139.7,9.6 139.7,9 139.2,8.5
  pour Bottom (no thermals): 151.1,13.8 148.4,13.8 148,14.2 148.3,14.5 149.2,14.5 149.4,14.3 151.1,14.3
  pour Bottom: 145.9,18.9 146.3,18.9 146.6,19.2 146.2,19.6 145.9,19.3
I2C_SCL
  Bottom 0.25: IC3.21 10.75,9.05 11.7,8.1
  Bottom 0.5: 11.7,8.1 14.8,5 24.8,5
  pour Bottom: 11.7,7.9 10.8,8.8 10.8,9.2 11.9,8.1
I2C_SCL1
  Bottom 0.25: IC1.21 36.75,9.05 37.7,8.1
  Bottom 0.5: 37.7,8.1 40.8,5 50.8,5
  pour Bottom: 37.7,7.9 36.8,8.8 36.8,9.2 37.9,8.1
I2C_SCL2
  Bottom 0.25: IC2.21 62.75,9.05 63.7,8.1
  Bottom 0.5: 63.7,8.1 66.8,5 76.8,5
  pour Bottom: 63.7,7.9 62.8,8.8 62.8,9.2 63.9,8.1
I2C_SCL3
  Bottom 0.25: IC4.21 88.75,9.05 89.7,8.1
  Bottom 0.5: 89.7,8.1 92.8,5 102.8,5
  pour Bottom: 89.7,7.9 88.8,8.8 88.8,9.2 89.9,8.1
I2C_SCL4
  Bottom 0.25: IC5.21 114.75,9.05 115.7,8.1
  Bottom 0.5: 115.7,8.1 118.8,5 128.8,5
  pour Bottom: 115.7,7.9 114.8,8.8 114.8,9.2 115.9,8.1
I2C_SCL5
  Bottom 0.25: IC6.21 140.75,9.05 141.7,8.1
  Bottom 0.5: 141.7,8.1 144.8,5 154.8,5
  pour Bottom: 141.7,7.9 140.8,8.8 140.8,9.2 141.9,8.1
I2C_SDA
  Bottom 0.25: IC3.22 10.25,8.15 11.8,6.6
  Bottom 0.5: 11.8,6.6 14.4,4 24.8,4
  pour Bottom: 11.7,6.5 10.3,7.9 10.3,8.3 11.9,6.7
I2C_SDA1
  Bottom 0.25: IC1.22 36.25,8.15 37.8,6.6
  Bottom 0.5: 37.8,6.6 40.4,4 50.8,4
  pour Bottom: 37.7,6.5 36.3,7.9 36.3,8.3 37.9,6.7
I2C_SDA2
  Bottom 0.25: IC2.22 62.25,8.15 63.8,6.6
  Bottom 0.5: 63.8,6.6 66.4,4 76.8,4
  pour Bottom: 63.7,6.5 62.3,7.9 62.3,8.3 63.9,6.7
I2C_SDA3
  Bottom 0.25: IC4.22 88.25,8.15 89.8,6.6
  Bottom 0.5: 89.8,6.6 92.4,4 102.8,4
  pour Bottom: 89.7,6.5 88.3,7.9 88.3,8.3 89.9,6.7
I2C_SDA4
  Bottom 0.25: IC5.22 114.25,8.15 115.8,6.6
  Bottom 0.5: 115.8,6.6 118.4,4 128.8,4
  pour Bottom: 115.7,6.5 114.3,7.9 114.3,8.3 115.9,6.7
I2C_SDA5
  Bottom 0.25: IC6.22 140.25,8.15 141.8,6.6
  Bottom 0.5: 141.8,6.6 144.4,4 154.8,4
  pour Bottom: 141.7,6.5 140.3,7.9 140.3,8.3 141.9,6.7
LCD_D1
  Bottom 0.25: IC1.27 31.35,13.25 30.9,13.7
  Bottom 0.5: 30.9,13.7 28.7,13.7 27,12 27,3.5 29.5,1 50.8,1
  pour Bottom: 30.6,13.8 31,13.8 31.5,13.3 31.1,13.3
LCD_D2
  Bottom 0.25: IC1.26 30.65,12.75
  Bottom 0.5: 30.65,12.75 29.25,12.75 28,11.5 28,3.9 29.9,2 50.9,2
LCD_D3
  Bottom 0.25: IC1.28 32.15,13.75 31.6,14.3
  Bottom 0.5: 31.6,14.3 31.2,14.7 27.2,14.7
  pour Bottom: 31.2,14.5 31.9,13.8 32.5,13.8 31.8,14.5
LCD_D4
  Bottom 0.25: IC3.25 7.05,12.25 6.6,11.8
  Bottom 0.5: 6.6,11.8 3.8,11.8 3,11 3,4.3 4.3,3 24.9,3
  pour Bottom (no thermals): 5.8,11.7 6.7,11.7 6.9,11.9 6.9,12.1 6.2,12.1
LCD_D5
  Bottom 0.25: IC3.28 6.15,13.75 5.6,14.3
  Bottom 0.5: 5.6,14.3 5.2,14.7 1.2,14.7
  pour Bottom: 5.2,14.5 5.9,13.8 6.5,13.8 5.8,14.5
LCD_D6
  Bottom 0.25: IC3.26 4.65,12.75
  Bottom 0.5: 4.65,12.75 3.25,12.75 2,11.5 2,3.9 3.9,2 24.9,2
LCD_D7
  Bottom 0.25: IC3.27 5.35,13.25 4.9,13.7
  Bottom 0.5: 4.9,13.7 2.7,13.7 1,12 1,3.5 3.5,1 24.8,1
  pour Bottom: 4.6,13.8 5,13.8 5.5,13.3 5.1,13.3
LCD_D8
  Bottom 0.25: IC1.25 33.05,12.25 32.6,11.8
  Bottom 0.5: 32.6,11.8 29.8,11.8 29,11 29,4.3 30.3,3 50.9,3
  pour Bottom (no thermals): 31.8,11.7 32.7,11.7 32.9,11.9 32.9,12.1 32.2,12.1
LCD_D9
  Bottom 0.25: IC2.27 57.35,13.25 56.9,13.7
  Bottom 0.5: 56.9,13.7 54.7,13.7 53,12 53,3.5 55.5,1 76.8,1
  pour Bottom: 56.6,13.8 57,13.8 57.5,13.3 57.1,13.3
LCD_D10
  Bottom 0.25: IC2.26 56.65,12.75
  Bottom 0.5: 56.65,12.75 55.25,12.75 54,11.5 54,3.9 55.9,2 76.9,2
LCD_D11
  Bottom 0.25: IC2.28 58.15,13.75 57.6,14.3
  Bottom 0.5: 57.6,14.3 57.2,14.7 53.2,14.7
  pour Bottom: 57.2,14.5 57.9,13.8 58.5,13.8 57.8,14.5
LCD_D12
  Bottom 0.25: IC2.25 59.05,12.25 58.6,11.8
  Bottom 0.5: 58.6,11.8 55.8,11.8 55,11 55,4.3 56.3,3 76.9,3
  pour Bottom (no thermals): 57.8,11.7 58.7,11.7 58.9,11.9 58.9,12.1 58.2,12.1
LCD_D13
  Bottom 0.25: IC4.27 83.35,13.25 82.9,13.7
  Bottom 0.5: 82.9,13.7 80.7,13.7 79,12 79,3.5 81.5,1 102.8,1
  pour Bottom: 82.6,13.8 83,13.8 83.5,13.3 83.1,13.3
LCD_D14
  Bottom 0.25: IC4.26 82.65,12.75
  Bottom 0.5: 82.65,12.75 81.25,12.75 80,11.5 80,3.9 81.9,2 102.9,2
LCD_D15
  Bottom 0.25: IC4.28 84.15,13.75 83.6,14.3
  Bottom 0.5: 83.6,14.3 83.2,14.7 79.2,14.7
  pour Bottom: 83.2,14.5 83.9,13.8 84.5,13.8 83.8,14.5
LCD_D16
  Bottom 0.25: IC4.25 85.05,12.25 84.6,11.8
  Bottom 0.5: 84.6,11.8 81.8,11.8 81,11 81,4.3 82.3,3 102.9,3
  pour Bottom (no thermals): 83.8,11.7 84.7,11.7 84.9,11.9 84.9,12.1 84.2,12.1
LCD_D17
  Bottom 0.25: IC5.27 109.35,13.25 108.9,13.7
  Bottom 0.5: 108.9,13.7 106.7,13.7 105,12 105,3.5 107.5,1 128.8,1
  pour Bottom: 108.6,13.8 109,13.8 109.5,13.3 109.1,13.3
LCD_D18
  Bottom 0.25: IC5.26 108.65,12.75
  Bottom 0.5: 108.65,12.75 107.25,12.75 106,11.5 106,3.9 107.9,2 128.9,2
LCD_D19
  Bottom 0.25: IC5.28 110.15,13.75 109.6,14.3
  Bottom 0.5: 109.6,14.3 109.2,14.7 105.2,14.7
  pour Bottom: 109.2,14.5 109.9,13.8 110.5,13.8 109.8,14.5
LCD_D20
  Bottom 0.25: IC5.25 111.05,12.25 110.6,11.8
  Bottom 0.5: 110.6,11.8 107.8,11.8 107,11 107,4.3 108.3,3 128.9,3
  pour Bottom (no thermals): 109.8,11.7 110.7,11.7 110.9,11.9 110.9,12.1 110.2,12.1
LCD_D21
  Bottom 0.25: IC6.27 135.35,13.25 134.9,13.7
  Bottom 0.5: 134.9,13.7 132.7,13.7 131,12 131,3.5 133.5,1 154.8,1
  pour Bottom: 134.6,13.8 135,13.8 135.5,13.3 135.1,13.3
LCD_D22
  Bottom 0.25: IC6.26 134.65,12.75
  Bottom 0.5: 134.65,12.75 133.25,12.75 132,11.5 132,3.9 133.9,2 154.9,2
LCD_D23
  Bottom 0.25: IC6.28 136.15,13.75 135.6,14.3
  Bottom 0.5: 135.6,14.3 135.2,14.7 131.2,14.7
  pour Bottom: 135.2,14.5 135.9,13.8 136.5,13.8 135.8,14.5
LCD_D24
  Bottom 0.25: IC6.25 137.05,12.25 136.6,11.8
  Bottom 0.5: 136.6,11.8 133.8,11.8 133,11 133,4.3 134.3,3 154.9,3
  pour Bottom (no thermals): 135.8,11.7 136.7,11.7 136.9,11.9 136.9,12.1 136.2,12.1
LCD_E
  Bottom 0.25: IC3.43 12.25,20.25 11.3,21.2
  Bottom 0.5: 11.3,21.2 11,21.5
  pour Bottom: 11.2,21.2 11.8,20.6 11.8,20.9 11.2,21.5
LCD_E1
  Bottom 0.25: IC1.43 38.25,20.25 37.3,21.2
  Bottom 0.5: 37.3,21.2 37,21.5
  pour Bottom: 37.2,21.2 37.8,20.6 37.8,20.9 37.2,21.5
LCD_E2
  Bottom 0.25: IC2.43 64.25,20.25 63.3,21.2
  Bottom 0.5: 63.3,21.2 63,21.5
  pour Bottom: 63.2,21.2 63.8,20.6 63.8,20.9 63.2,21.5
LCD_E3
  Bottom 0.25: IC4.43 90.25,20.25 89.3,21.2
  Bottom 0.5: 89.3,21.2 89,21.5
  pour Bottom: 89.2,21.2 89.8,20.6 89.8,20.9 89.2,21.5
LCD_E4
  Bottom 0.25: IC5.43 116.25,20.25 115.3,21.2
  Bottom 0.5: 115.3,21.2 115,21.5
  pour Bottom: 115.2,21.2 115.8,20.6 115.8,20.9 115.2,21.5
LCD_E5
  Bottom 0.25: IC6.43 142.25,20.25 141.3,21.2
  Bottom 0.5: 141.3,21.2 141,21.5
  pour Bottom: 141.2,21.2 141.8,20.6 141.8,20.9 141.2,21.5
LCD_R/~W
  Bottom 0.25: IC3.46 13.75,20.75 14.6,21.6
  Bottom 0.5: 14.6,21.6 16.8,23.8
  Bottom 0.8: 22.2,22 20.4,23.8 16.8,23.8
LCD_R/~W1
  Bottom 0.25: IC1.46 39.75,20.75 40.6,21.6
  Bottom 0.5: 40.6,21.6 42.8,23.8
  Bottom 0.8: 48.2,22 46.4,23.8 42.8,23.8
LCD_R/~W2
  Bottom 0.25: IC2.46 65.75,20.75 66.6,21.6
  Bottom 0.5: 66.6,21.6 68.8,23.8
  Bottom 0.8: 74.2,22 72.4,23.8 68.8,23.8
LCD_R/~W3
  Bottom 0.25: IC4.46 91.75,20.75 92.6,21.6
  Bottom 0.5: 92.6,21.6 94.8,23.8
  Bottom 0.8: 100.2,22 98.4,23.8 94.8,23.8
LCD_R/~W4
  Bottom 0.25: IC5.46 117.75,20.75 118.6,21.6
  Bottom 0.5: 118.6,21.6 120.8,23.8
  Bottom 0.8: 126.2,22 124.4,23.8 120.8,23.8
LCD_R/~W5
  Bottom 0.25: IC6.46 143.75,20.75 144.6,21.6
  Bottom 0.5: 144.6,21.6 146.8,23.8
  Bottom 0.8: 152.2,22 150.4,23.8 146.8,23.8
LCD_RS
  Bottom 0.25: IC3.45 13.25,22.15 14,22.9
  Bottom 0.8: 15,23.9 14,22.9
  pour Bottom: 13.3,21.8 13.3,22.6 13.8,23.1 14.2,22.7
LCD_RS1
  Bottom 0.25: IC1.45 39.25,22.15 40,22.9
  Bottom 0.8: 41,23.9 40,22.9
  pour Bottom: 39.3,21.8 39.3,22.6 39.8,23.1 40.2,22.7
LCD_RS2
  Bottom 0.25: IC2.45 65.25,22.15 66,22.9
  Bottom 0.8: 67,23.9 66,22.9
  pour Bottom: 65.3,21.8 65.3,22.6 65.8,23.1 66.2,22.7
LCD_RS3
  Bottom 0.25: IC4.45 91.25,22.15 92,22.9
  Bottom 0.8: 93,23.9 92,22.9
  pour Bottom: 91.3,21.8 91.3,22.6 91.8,23.1 92.2,22.7
LCD_RS4
  Bottom 0.25: IC5.45 117.25,22.15 118,22.9
  Bottom 0.8: 119,23.9 118,22.9
  pour Bottom: 117.3,21.8 117.3,22.6 117.8,23.1 118.2,22.7
LCD_RS5
  Bottom 0.25: IC6.45 143.25,22.15 144,22.9
  Bottom 0.8: 145,23.9 144,22.9
  pour Bottom: 143.3,21.8 143.3,22.6 143.8,23.1 144.2,22.7
N$1
  Bottom 0.8: 27.3,31 31.4,31 32.35,30.05 R2.PAD_1
N$2
  Bottom 0.8: 53.3,31 57.4,31 58.35,30.05 R4.PAD_1
N$3
  Bottom 0.8: 79.3,31 83.4,31 84.35,30.05 R6.PAD_1
N$4
  Bottom 0.8: 105.3,31 109.4,31 110.35,30.05 R8.PAD_1
N$5
  Bottom 0.8: 131.3,31 135.4,31 136.35,30.05 R10.PAD_1
N$19
  Bottom 0.8: 1.3,31 5.4,31 6.35,30.05 R33.PAD_1
NRST
  Bottom 0.25: IC3.7 17.35,14.75 18.1,15.5
  Bottom 0.406: 23.95,16 C14.PAD_1
  Bottom 0.5: 18.1,15.5 18.5,15.9 23.95,15.9 | C14.PAD_1 23.95,15.9 | 23.95,15.9 24,15.85 R30.PAD_1
NRST1
  Bottom 0.25: IC1.7 43.35,14.75 44.1,15.5
  Bottom 0.406: 49.95,16 C5.PAD_1
  Bottom 0.5: 44.1,15.5 44.5,15.9 49.95,15.9 | C5.PAD_1 49.95,15.9 | 49.95,15.9 50,15.85 R1.PAD_1
NRST2
  Bottom 0.25: IC2.7 69.35,14.75 70.1,15.5
  Bottom 0.406: 75.95,16 C15.PAD_1
  Bottom 0.5: 70.1,15.5 70.5,15.9 75.95,15.9 | C15.PAD_1 75.95,15.9 | 75.95,15.9 76,15.85 R3.PAD_1
NRST3
  Bottom 0.25: IC4.7 95.35,14.75 96.1,15.5
  Bottom 0.406: 101.95,16 C20.PAD_1
  Bottom 0.5: 96.1,15.5 96.5,15.9 101.95,15.9 | C20.PAD_1 101.95,15.9 | 101.95,15.9 102,15.85 R5.PAD_1
NRST4
  Bottom 0.25: IC5.7 121.35,14.75 122.1,15.5
  Bottom 0.406: 127.95,16 C25.PAD_1
  Bottom 0.5: 122.1,15.5 122.5,15.9 127.95,15.9 | C25.PAD_1 127.95,15.9 | 127.95,15.9 128,15.85 R7.PAD_1
NRST5
  Bottom 0.25: IC6.7 147.35,14.75 148.1,15.5
  Bottom 0.406: 153.95,16 C30.PAD_1
  Bottom 0.5: 148.1,15.5 148.5,15.9 153.95,15.9 | C30.PAD_1 153.95,15.9 | 153.95,15.9 154,15.85 R9.PAD_1
PWR_HOLD
  Bottom 0.25: IC3.31 6.15,15.25 5.6,15.8
  Bottom 0.8: 5.6,15.8 5.4,16 1.3,16
  pour Bottom: 5.2,15.8 5.7,15.3 6.5,15.3 6,15.8
PWR_HOLD1
  Bottom 0.25: IC1.31 32.15,15.25 31.6,15.8
  Bottom 0.8: 31.6,15.8 31.4,16 27.3,16
  pour Bottom: 31.2,15.8 31.7,15.3 32.5,15.3 32,15.8
PWR_HOLD2
  Bottom 0.25: IC2.31 58.15,15.25 57.6,15.8
  Bottom 0.8: 57.6,15.8 57.4,16 53.3,16
  pour Bottom: 57.2,15.8 57.7,15.3 58.5,15.3 58,15.8
PWR_HOLD3
  Bottom 0.25: IC4.31 84.15,15.25 83.6,15.8
  Bottom 0.8: 83.6,15.8 83.4,16 79.3,16
  pour Bottom: 83.2,15.8 83.7,15.3 84.5,15.3 84,15.8
PWR_HOLD4
  Bottom 0.25: IC5.31 110.15,15.25 109.6,15.8
  Bottom 0.8: 109.6,15.8 109.4,16 105.3,16
  pour Bottom: 109.2,15.8 109.7,15.3 110.5,15.3 110,15.8
PWR_HOLD5
  Bottom 0.25: IC6.31 136.15,15.25 135.6,15.8
  Bottom 0.8: 135.6,15.8 135.4,16 131.3,16
  pour Bottom: 135.2,15.8 135.7,15.3 136.5,15.3 136,15.8
SWDCLK
  Bottom 0.25: IC3.37 9.25,20.15 8.8,20.6
  Bottom 0.5: 8.8,20.6 8.8,24.8 7.6,26 6,26 4,28
  pour Bottom (no thermals): 8.7,20.9 8.7,20.4 9.2,19.9 9.2,20.4
SWDCLK1
  Bottom 0.25: IC1.37 35.25,20.15 34.8,20.6
  Bottom 0.5: 34.8,20.6 34.8,24.8 33.6,26 32,26 30,28
  pour Bottom (no thermals): 34.7,20.9 34.7,20.4 35.2,19.9 35.2,20.4
SWDCLK2
  Bottom 0.25: IC2.37 61.25,20.15 60.8,20.6
  Bottom 0.5: 60.8,20.6 60.8,24.8 59.6,26 58,26 56,28
  pour Bottom (no thermals): 60.7,20.9 60.7,20.4 61.2,19.9 61.2,20.4
SWDCLK3
  Bottom 0.25: IC4.37 87.25,20.15 86.8,20.6
  Bottom 0.5: 86.8,20.6 86.8,24.8 85.6,26 84,26 82,28
  pour Bottom (no thermals): 86.7,20.9 86.7,20.4 87.2,19.9 87.2,20.4
SWDCLK4
  Bottom 0.25: IC5.37 113.25,20.15 112.8,20.6
  Bottom 0.5: 112.8,20.6 112.8,24.8 111.6,26 110,26 108,28
  pour Bottom (no thermals): 112.7,20.9 112.7,20.4 113.2,19.9 113.2,20.4
SWDCLK5
  Bottom 0.25: IC6.37 139.25,20.15 138.8,20.6
  Bottom 0.5: 138.8,20.6 138.8,24.8 137.6,26 136,26 134,28
  pour Bottom (no thermals): 138.7,20.9 138.7,20.4 139.2,19.9 139.2,20.4
SWDIO
  Bottom 0.25: IC3.34 6.45,16.75 5.9,17.3
  Bottom 0.8: 5.9,17.3 5.5,17.7 2.2,17.7 1.3,18.6
  pour Bottom: 5.3,17.5 6,16.8 6.7,16.8 6,17.5
SWDIO1
  Bottom 0.25: IC1.34 32.45,16.75 31.9,17.3
  Bottom 0.8: 31.9,17.3 31.5,17.7 28.2,17.7 27.3,18.6
  pour Bottom: 31.3,17.5 32,16.8 32.7,16.8 32,17.5
SWDIO2
  Bottom 0.25: IC2.34 58.45,16.75 57.9,17.3
  Bottom 0.8: 57.9,17.3 57.5,17.7 54.2,17.7 53.3,18.6
  pour Bottom: 57.3,17.5 58,16.8 58.7,16.8 58,17.5
SWDIO3
  Bottom 0.25: IC4.34 84.45,16.75 83.9,17.3
  Bottom 0.8: 83.9,17.3 83.5,17.7 80.2,17.7 79.3,18.6
  pour Bottom: 83.3,17.5 84,16.8 84.7,16.8 84,17.5
SWDIO4
  Bottom 0.25: IC5.34 110.45,16.75 109.9,17.3
  Bottom 0.8: 109.9,17.3 109.5,17.7 106.2,17.7 105.3,18.6
  pour Bottom: 109.3,17.5 110,16.8 110.7,16.8 110,17.5
SWDIO5
  Bottom 0.25: IC6.34 136.45,16.75 135.9,17.3
  Bottom 0.8: 135.9,17.3 135.5,17.7 132.2,17.7 131.3,18.6
  pour Bottom: 135.3,17.5 136,16.8 136.7,16.8 136,17.5

## Text on the board
Bottom: 0:50 | 1:00 | 1:10 | 1:20 | 1:30 | 1:40